# Altium PCB lora.PcbDoc
Units mil, origin at the board's own origin, x right, y up, seen from the top; angles counter-clockwise.
Board outline 6000 x 4000 mil, 2 copper layers (Top Layer, Bottom Layer); 5 components, 13 nets, 59 pads, 2 vias.
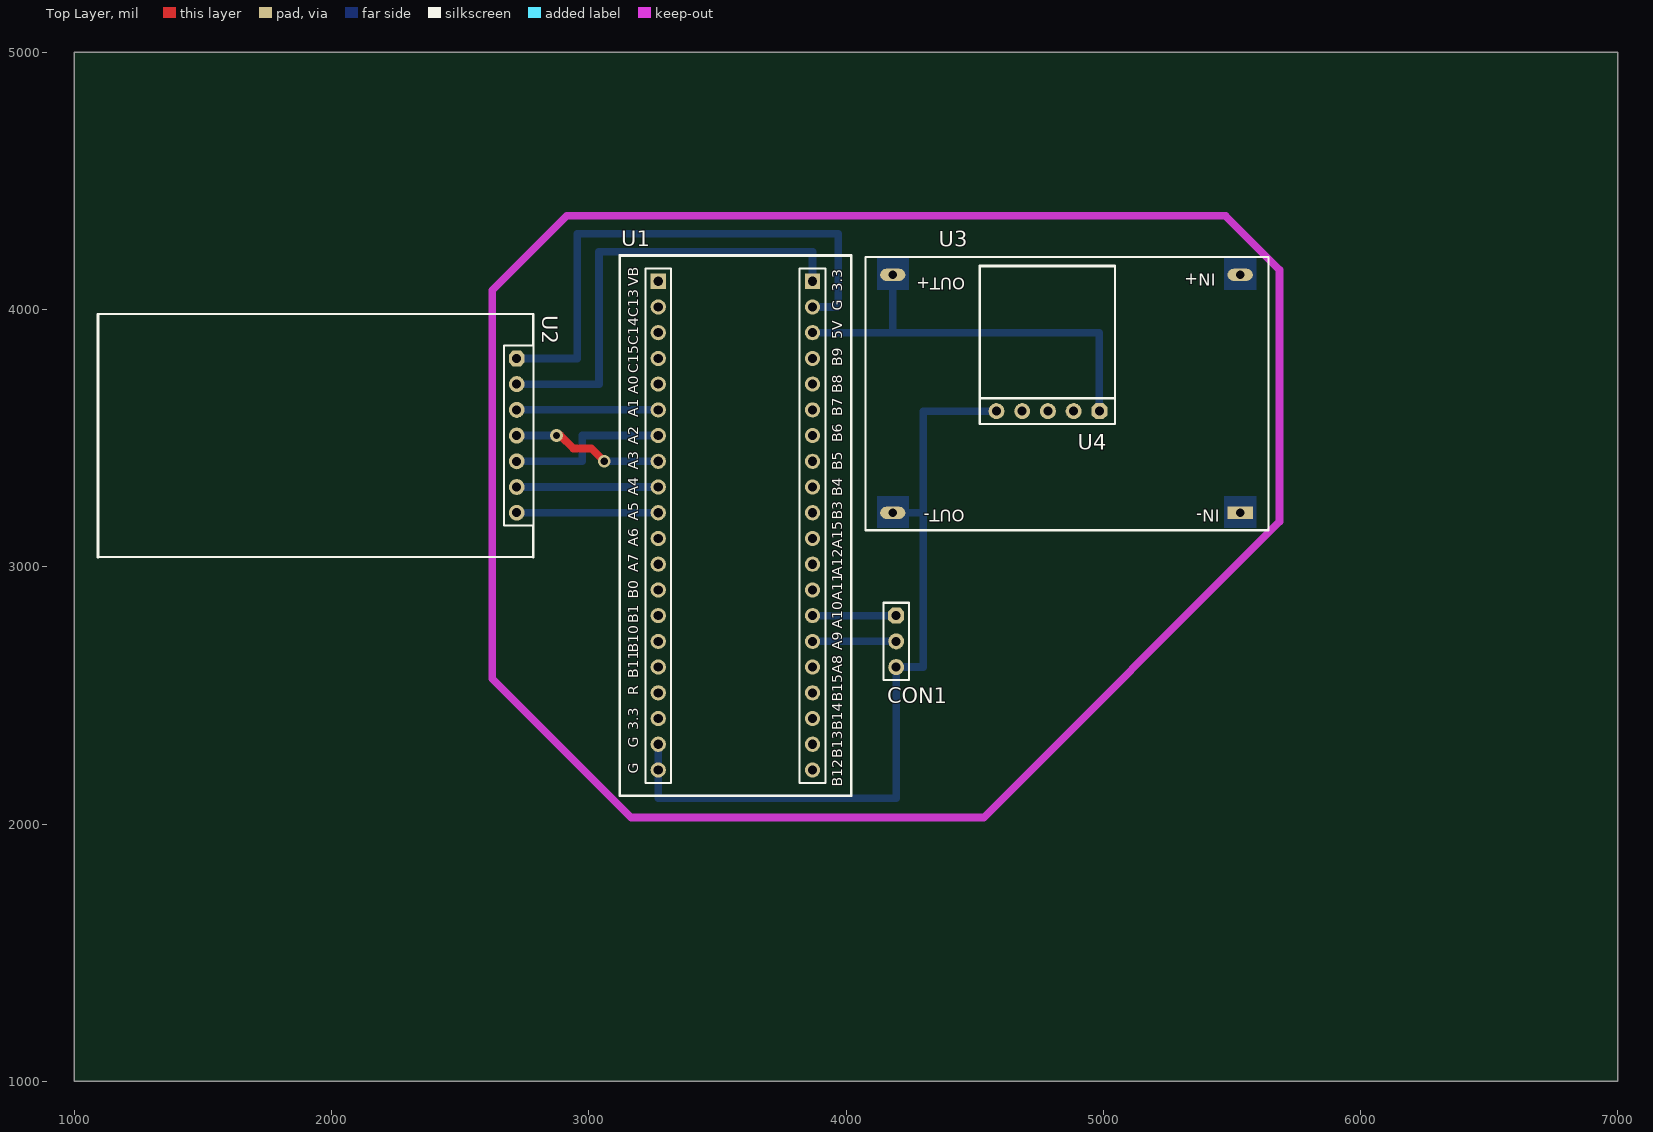
[diagram p0: Top Layer view]
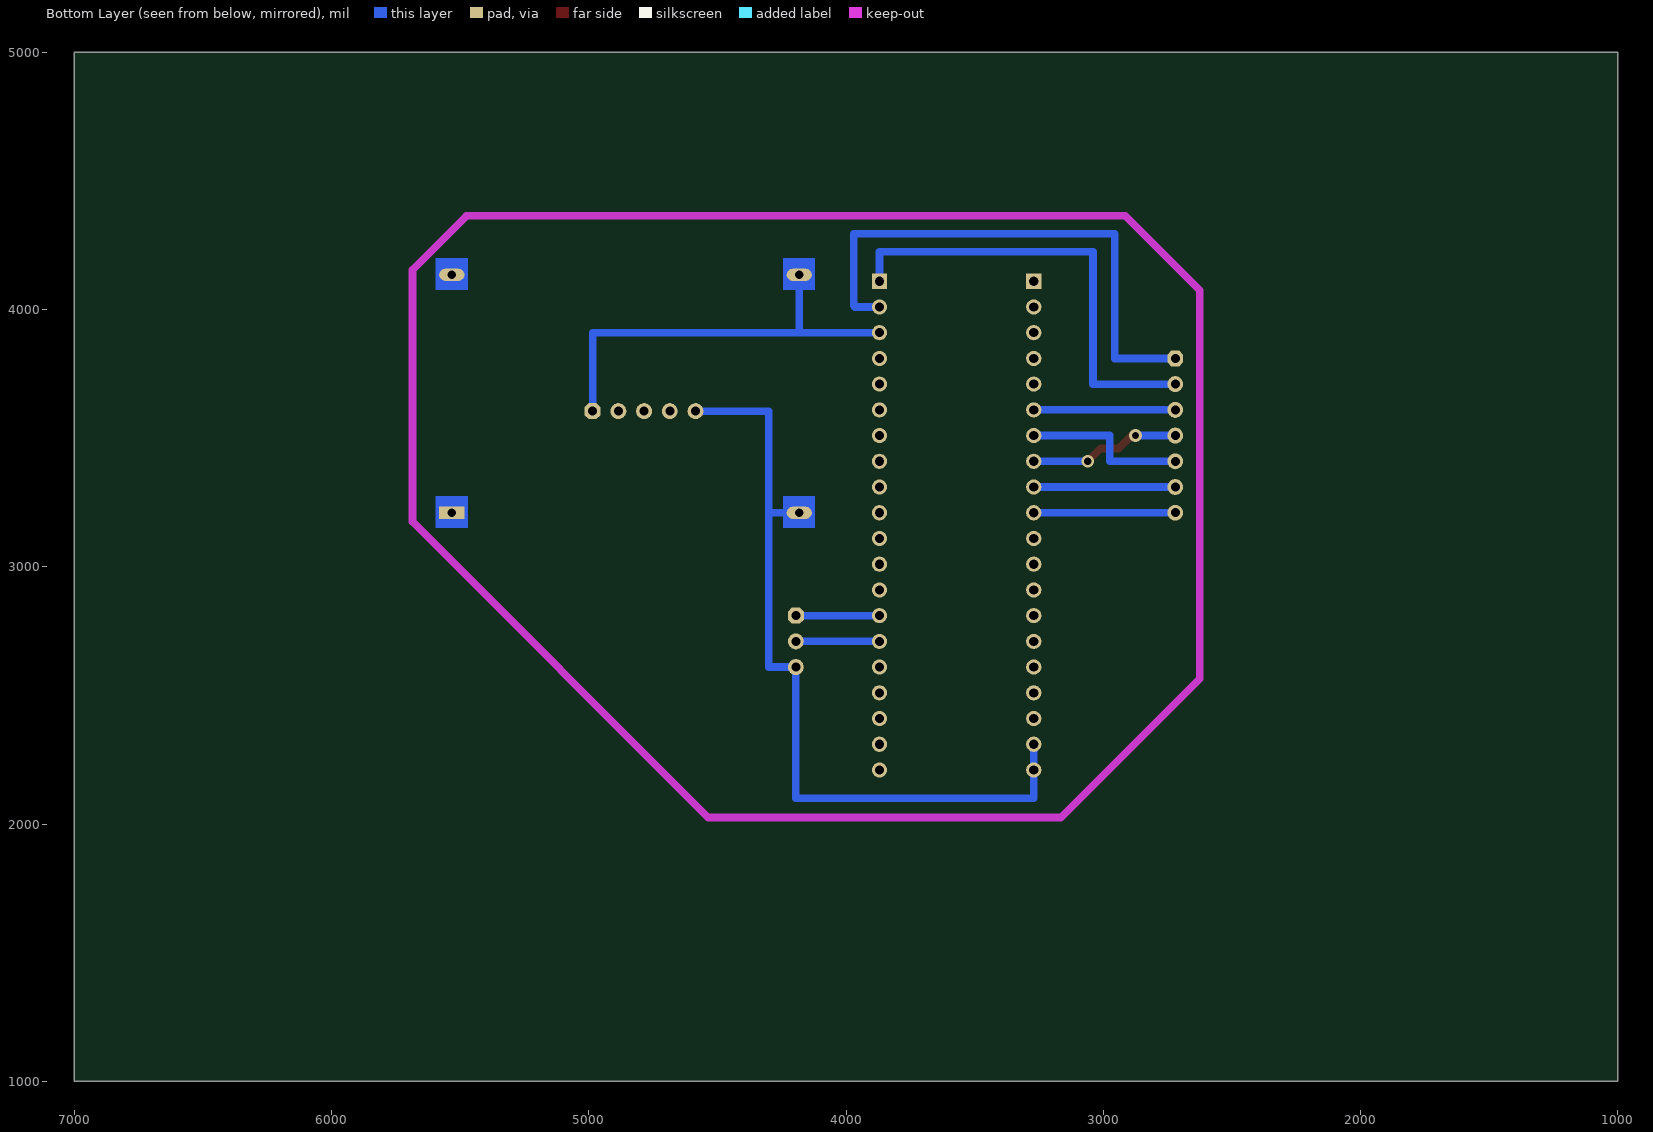
[diagram p1: Bottom Layer view, seen from below]

## Layer stack, top to bottom
Top Solder: solder mask 0.4, Solder Resist, Dk 3.5
Top Layer: signal copper 1.4
Dielectric 1: dielectric 12.6, FR-4, Dk 4.8
Bottom Layer: signal copper 1.4
Bottom Solder: solder mask 0.4, Solder Resist, Dk 3.5

## Board outline
1000,1000 7000,1000 7000,5000 1000,5000

## Design rules (kind name [scope] priority, off if disabled: settings)
Clearance [All] p1: gap=10
PolygonConnect [All] p1: connectstyle=Relief reliefconductorwidth=10 reliefentries=4 polygonreliefangle="90 Angle" airgapwidth=10
RoutingVias [All] p1: holewidth=28 width=50 viastyle="Through Hole" minholewidth=28 minwidth=50 maxholewidth=28 maxwidth=50
SolderMaskExpansion [All] p1: expansion=4
Width [All] p1: maxlimit=30 minlimit=30 preferedwidth=30
30 further rules are at their usual default settings.

## Components (designator, comment, footprint, x,y, rotation, side; value= is the part's Value field where it differs from the comment)
CON1 "CON 1X3" "CON 1X3" 4195,2810 r270 top
U1 "STM32F103C8T6" STM32C8T6 3087,4419 r0 top
U2 "Lora1268" Lora模块 2605,3510 r270 top
U3 "LM2576" LM2576 4745,3780 r180 top
U4 "micro" micro 4785,3605 r180 top

## Footprints (in the part's own frame and the unit in brackets; to place one, negate y for a bottom-side part, rotate by r counter-clockwise, add the part's x,y. Pads: shape width x height; smd on the part's side, far side on the other; paste and mask are expansions set on the pad)
"CON 1X3" [mil]
  oct 62x62 hole 35: 1(0,0)
  round 62 hole 35: 2(100,0) 3(200,0)
  silkscreen extent -50,-50 250,50
LM2576 [mm]
  rect 2.5x1.2 hole 0.85: 1(-19.996,14.483)
  oval 2.5x1.2 hole 0.85: 2(-19.996,-9.017) 3(14.304,14.483) 4(14.304,-9.017)
  silkscreen extent -22.79,-10.8 16.99,16.21
Lora模块 [mil]
  round 62 hole 35: 1(300,115) 2(200,115) 3(100,115) 4(0,115) 5(-100,115) 6(-200,115)
  oct 62x62 hole 35: 7(-300,115)
  silkscreen extent -472,-1513 472,180
micro [mil]
  oct 62x62 hole 35: 1(-200,0)
  round 62 hole 35: 2(-100,0) 3(0,0) 4(100,0) 5(200,0)
  silkscreen extent -260,-564 265,50
STM32C8T6 [mm]
  rect 1.5x1.5 hole 0.9: 1(4.648,-7.849) 21(19.888,-7.849)
  round 1.5 hole 0.9: 2(4.648,-10.389) 3(4.648,-12.929) 4(4.648,-15.469) 5(4.648,-18.009) 6(4.648,-20.549) 7(4.648,-23.089) 8(4.648,-25.629) 9(4.648,-28.169) 10(4.648,-30.709) 11(4.648,-33.249) 12(4.648,-35.789) 13(4.648,-38.329) 14(4.648,-40.869) 15(4.648,-43.409) 16(4.648,-45.949) 17(4.648,-48.489) 18(4.648,-51.029) 19(4.648,-53.569) 20(4.648,-56.109) 22(19.888,-10.389) 23(19.888,-12.929) 24(19.888,-15.469) 25(19.888,-18.009) 26(19.888,-20.549) 27(19.888,-23.089) 28(19.888,-25.629) 29(19.888,-28.169) 30(19.888,-30.709) 31(19.888,-33.249) 32(19.888,-35.789) 33(19.888,-38.329) 34(19.888,-40.869) 35(19.888,-43.409) 36(19.888,-45.949) 37(19.888,-48.489) 38(19.888,-51.029) 39(19.888,-53.569) 40(19.888,-56.109)
  silkscreen extent 0.84,-58.65 23.7,-5.31

## Part data
CON1: "单排排针"
U1: library part STM32C8T6

## Via types
v1: diameter 50, hole 28, Top Layer to Bottom Layer, 2 vias

## Nets (pads, with @x,y where several pads share a name; then routed paths per layer and width w, separated by ;. In a path a pad name is that pad's centre, name@x,y a point inside that pad or via, vN(x,y) a via of type N, cw(c..) or ccw(c..) an arc to the next point about the centre after c; other vN are vias at no path point)
5.0V: U1.23 U3.4 U4.1 | length 1645
  Bottom Layer w30: U1.23 4181.85,3910 ; U3.4 4181.85,3910 ; U4.1 4985,3910 4181.85,3910
GND: CON1.3 U1.19 U1.20 U3.3 U4.5 | length 3148.1
  Bottom Layer w30: U1.19 U1.20 3270,2100 4195,2100 CON1.3 4300,2610 4300,3209.8 ; U3.3 4300,3209.8 ; U4.5 4300,3605 4300,3209.8
IN-: U3.1
NetU1_6: U1.6 U2.5 | length 550
  Bottom Layer w30: U2.5 U1.6
NetU1_9: U1.9 U2.2 | length 550
  Bottom Layer w30: U2.2 U1.9
NetU1_10: U1.10 U2.1 | length 550
  Bottom Layer w30: U2.1 U1.10
NetU1_21: U1.21 U2.6 | length 1780
  Bottom Layer w30: U2.6 3040,3710 3040,4225 3870,4225 U1.21
NetU1_22: U1.22 U2.7 | length 2117.1
  Bottom Layer w30: U2.7 2955,3810 2955,4295 3970,4295 3970,4015 3965,4010 U1.22
OUT_USART1_RX: CON1.1 U1.34 | length 325
  Bottom Layer w30: U1.34 CON1.1
OUT_USART1_TX: CON1.2 U1.35 | length 325
  Bottom Layer w30: U1.35 CON1.2
OUT_USART2_RX: U1.8 U2.4 | length 591.4
  Top Layer w30: v1(2875,3510) 2890,3510 2940,3460 3010,3460 v1(3060,3410)
  Bottom Layer w30: U2.4 v1(2875,3510) ; v1(3060,3410) U1.8
OUT_USART2_TX: U1.7 U2.3 | length 650
  Bottom Layer w30: U2.3 2975,3410 2975,3510 U1.7
VCC: U3.2
pads on no net: U1.1 U1.2 U1.3 U1.4 U1.5 U1.11 U1.12 U1.13 U1.14 U1.15 U1.16 U1.17 U1.18 U1.24 U1.25 U1.26 U1.27 U1.28 U1.29 U1.30 U1.31 U1.32 U1.33 U1.36 U1.37 U1.38 U1.39 U1.40 U4.2 U4.3 U4.4

## Keep-outs
Keep-Out Layer:
  lines w30: 2625,2565 2625,4075 2915,4365 5475,4365 5685,4155 5685,3175 4535,2025 3165,2025 2625,2565

## Other copper
Bottom Layer:
  rectangle net VCC: 5470,4075 5595,4200
  rectangle net IN-: 5470,3149.8 5595,3274.8
  rectangle net GND: 4119.61,3149.8 4244.61,3274.8
  rectangle net 5.0V: 4119.61,4075 4244.61,4200

## Text inside footprints (layer, text, board x,y; h text height)
U1: Top Overlay "3.3" at 3985,4070 h40 r90; Top Overlay "G" at 3985,3995 h40 r90; Top Overlay "5V" at 3985,3885 h40 r90; Top Overlay "B9" at 3985,3780 h40 r90; Top Overlay "B8" at 3985,3675 h40 r90; Top Overlay "B7" at 3985,3585 h40 r90; Top Overlay "B6" at 3985,3485 h40 r90; Top Overlay "B5" at 3985,3375 h40 r90; Top Overlay "B4" at 3985,3275 h40 r90; Top Overlay "B3" at 3985,3183 h40 r90; Top Overlay "A15" at 3985,3071 h40 r90; Top Overlay "A12" at 3985,2963 h40 r90; Top Overlay "A11" at 3985,2868 h40 r90; Top Overlay "A10" at 3985,2760 h40 r90; Top Overlay "A9" at 3985,2675 h40 r90; Top Overlay "A8" at 3985,2585 h40 r90; Top Overlay "B15" at 3985,2475 h40 r90; Top Overlay "B14" at 3985,2365 h40 r90; Top Overlay "B13" at 3985,2255 h40 r90; Top Overlay "B12" at 3985,2145 h40 r90; Top Overlay "G" at 3193,2196 h40 r90; Top Overlay "G" at 3193,2296 h40 r90; Top Overlay "3.3" at 3193,2365 h40 r90; Top Overlay "VB" at 3193,4091 h40 r90; Top Overlay "A7" at 3193,2978 h40 r90; Top Overlay "C15C14C13" at 3193,3752 h40 r90; Top Overlay "A6" at 3193,3078 h40 r90; Top Overlay "A5" at 3193,3179 h40 r90; Top Overlay "A4" at 3193,3277 h40 r90; Top Overlay "A3" at 3193,3376.43 h40 r90; Top Overlay "A2" at 3193,3474.29 h40 r90; Top Overlay "A1" at 3193,3581 h40 r90; Top Overlay "A0" at 3193,3670 h40 r90; Top Overlay "B0" at 3193,2875 h40 r90; Top Overlay "B1" at 3193,2780 h40 r90; Top Overlay "B10" at 3193,2665 h40 r90; Top Overlay "B11" at 3193,2566 h40 r90; Top Overlay "R" at 3193,2500 h40 r90
U3: Top Overlay "OUT+" at 4464,4139 h80 r180; Top Overlay "OUT-" at 4462,3238 h80 r180; Top Overlay "IN+" at 5437.24,4155 h80 r180; Top Overlay "IN-" at 5452,3238 h80 r180